# EAGLE board blmc_m8 (EAGLE 4.15)
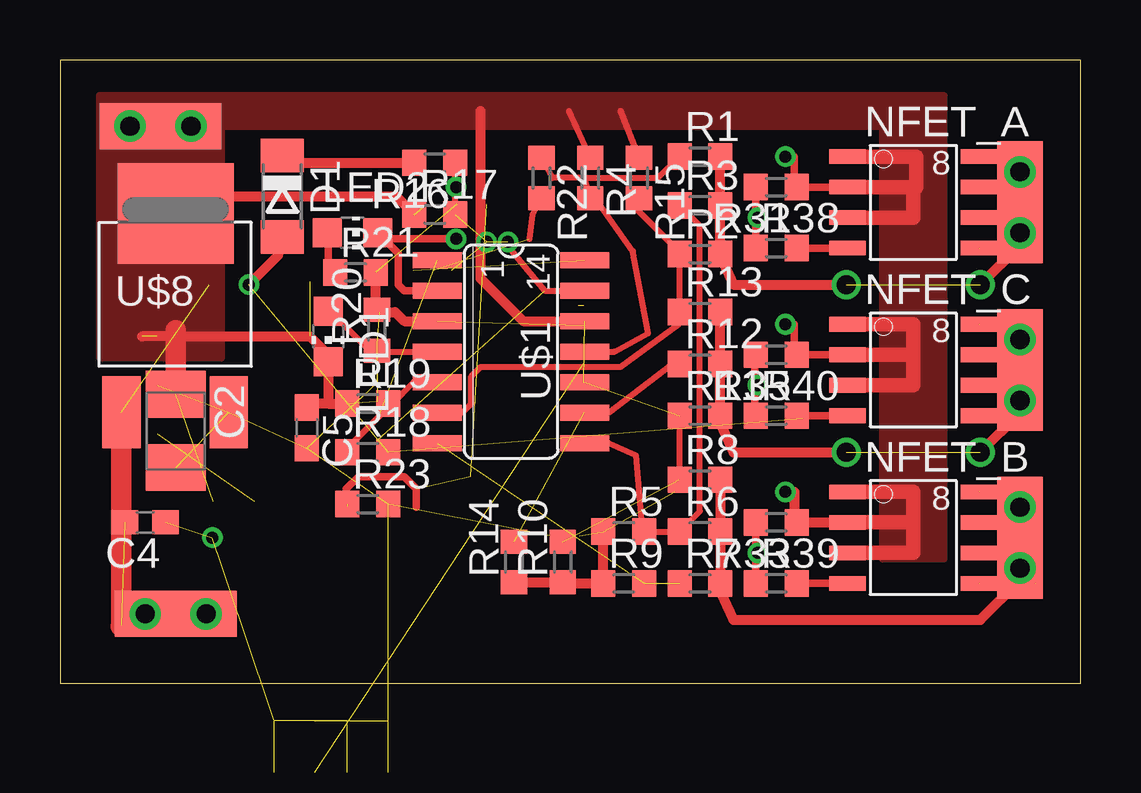
[diagram p0: board, top side]
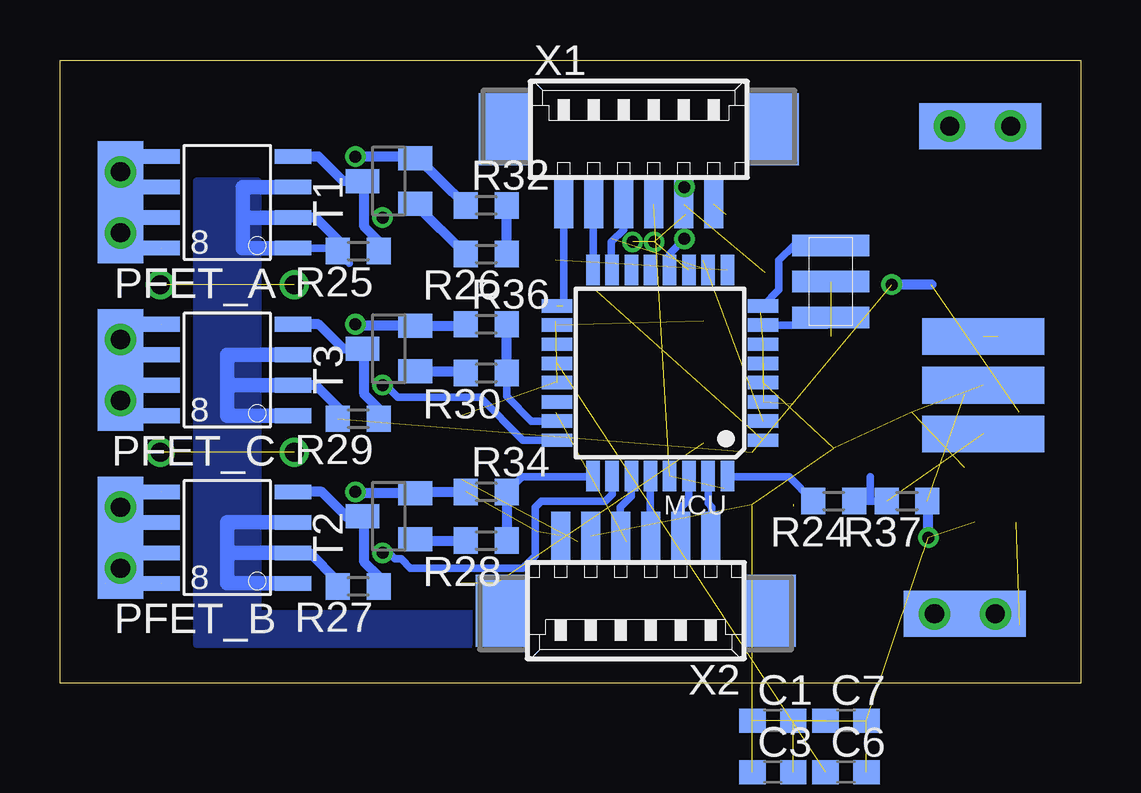
[diagram p1: board, bottom side, seen from below]

Size 42.53 x 25.96 mm. Coordinates in mm from the lower left corner, seen from the top.
Outline: 0,0 42.53,0 42.53,25.96 0,25.96 0,0
Copper layers (1*2+15*16): Top 0.035mm / dielectric 0.2mm / Route2 0.035mm / dielectric 1.5mm / Route15 0.035mm / dielectric 0.2mm / Bottom 0.035mm
Design rules "eurocircuits_verified_4l": minimum track width 0.15mm, minimum drill 0.35mm, track to track 0.15mm, track to pad 0.15mm, pad to pad 0.15mm, via to via 0.15mm, smd to smd 0.15mm, copper to edge 20mil, drill to drill 8mil, minimum pad ring 10mil, minimum via ring 7mil, stop-mask expansion 4mil, vias tented up to drill 0mil, thermal gap 10mil

## Footprints (pad centres in the part's own frame; a part is rotated, then mirrored left to right if it is on the bottom)
C0603 = smd 1.1 x 1: 1 -0.85,0; 2 0.85,0
B/3528-21R = smd 1.95 x 2.5: + 1.525,0; - -1.525,0
SOD80C = smd 1.4 x 1.8: A 1.7,0; C -1.7,0
CHIP-LED0805 = smd 1.2 x 1.2: A 0,-1.05; C 0,1.05
TQFP32-08 = smd 1.27 x 0.559: 1 -4.293,2.8; 2 -4.293,2; 3 -4.293,1.2; 4 -4.293,0.4; 5 -4.293,-0.4; 6 -4.293,-1.2; 7 -4.293,-2; 8 -4.293,-2.8; 17 4.293,-2.8; 18 4.293,-2; 19 4.293,-1.2; 20 4.293,-0.4; 21 4.293,0.4; 22 4.293,1.2; 23 4.293,2; 24 4.293,2.8 | smd 0.559 x 1.27: 9 -2.8,-4.293; 10 -2,-4.293; 11 -1.2,-4.293; 12 -0.4,-4.293; 13 0.4,-4.293; 14 1.2,-4.293; 15 2,-4.293; 16 2.8,-4.293; 25 2.8,4.293; 26 2,4.293; 27 1.2,4.293; 28 0.4,4.293; 29 -0.4,4.293; 30 -1.2,4.293; 31 -2,4.293; 32 -2.8,4.293
SOLD_PAD_1 = smd 1.905 x 5.08: P$1 0,0 | smd 1.905 x 5.08 bottom: P$2 0,0 | drill 0.8 round: P$3 0,1.27; P$4 0,-1.27
SO-8 = smd 1.524 x 0.61: 1 -2.743,1.27; 2 -2.743,0; 3 -2.743,-1.27; 4 -2.743,-2.54; 5 2.743,-2.54; 6 2.743,-1.27; 7 2.743,0; 8 2.743,1.27
R0603 = smd 1 x 1.1: 1 -0.85,0; 2 0.85,0
SOT23 = smd 1 x 1.4: 1 -0.95,-1.1; 2 0.95,-1.1; 3 0,1.1
SO-14 = smd 0.66 x 2.032: 1 -2.54,-3.073; 2 -1.27,-3.073; 3 0,-3.073; 4 1.27,-3.073; 5 2.54,-3.073; 6 3.81,-3.073; 7 5.08,-3.073; 8 5.08,3.073; 9 3.81,3.073; 10 2.54,3.073; 11 1.27,3.073; 12 0,3.073; 13 -1.27,3.073; 14 -2.54,3.073
SOLDER_PAD_200_50 = smd 5.08 x 1.524: P$1 0,0
TO252 = smd 1.6 x 2.997: 1 -2.261,-6.198; 3 2.21,-6.198 | smd 4.826 x 4.191: 4 0,2.083
MICRO_CRYSTAL = smd 0.9 x 3.2: P$1 -1.5,0; P$2 0,0; P$3 1.5,0
53261-06 = smd 0.8 x 2: 1 3.125,-2.5; 2 1.875,-2.5; 3 0.625,-2.5; 4 -0.625,-2.5; 5 -1.875,-2.5; 6 -3.125,-2.5 | smd 2.1 x 3: S1 5.625,0.625; S2 -5.625,0.625

## Placement (x,y rotation side)
C1  100nF  [C0603]  12.82,-1.56 0 bottom
C2  [B/3528-21R]  4.82,10.5 270 top
C3  100nF  [C0603]  12.82,-3.72 0 bottom  (outside the outline)
C4  100nF  [C0603]  3.55,6.69 180 top
C5  100nF  [C0603]  10.28,10.63 270 top
C6  100nF  [C0603]  9.77,-3.72 0 bottom  (outside the outline)
C7  100nF  [C0603]  9.77,-1.56 0 bottom
D1  [SOD80C]  9.27,20.28 270 top
LED1  [CHIP-LED0805]  11.17,14.44 180 top
LED2  [CHIP-LED0805]  12.19,18.76 270 top
MCU  MEGA8-AI  [TQFP32-08]  17.52,12.92 180 bottom
MOT_A  SOLDER_PAD100_75  [SOLD_PAD_1]  40,20.03 0 top
MOT_B  SOLDER_PAD100_75  [SOLD_PAD_1]  40,6.06 0 top
MOT_C  SOLDER_PAD100_75  [SOLD_PAD_1]  40,13.04 0 top
NFET_A  SI4420N  [SO-8]  35.56,20.66 0 top
NFET_B  SI4420N  [SO-8]  35.56,6.69 0 top
NFET_C  SI4420N  [SO-8]  35.56,13.68 0 top
PFET_A  SI4425P  [SO-8]  35.56,19.39 180 bottom
PFET_B  SI4425P  [SO-8]  35.56,5.42 180 bottom
PFET_C  SI4425P  [SO-8]  35.56,12.41 180 bottom
R1  10k  [R0603]  26.67,21.93 0 top
R2  20k  [R0603]  26.67,17.87 0 top
R3  20k  [R0603]  26.67,19.9 0 top
R4  2k2  [R0603]  22.09,21.04 270 top
R5  2k2  [R0603]  23.49,6.31 0 top
R6  20k  [R0603]  26.67,6.31 0 top
R7  10k  [R0603]  26.67,4.15 0 top
R8  20k  [R0603]  26.67,8.47 0 top
R9  2k2  [R0603]  23.49,4.15 0 top
R10  2k2  [R0603]  20.95,5.04 90 top
R11  20k  [R0603]  26.67,11.14 0 top
R12  10k  [R0603]  26.67,13.3 0 top
R13  20k  [R0603]  26.67,15.46 0 top
R14  2k2  [R0603]  18.92,5.04 90 top
R15  2k2  [R0603]  24.13,21.04 270 top
R16  20k  [R0603]  15.62,21.68 180 top
R17  2k2  [R0603]  15.62,19.52 0 top
R18  20k  [R0603]  12.82,9.61 0 top
R19  10k  [R0603]  12.82,11.65 0 top
R20  2k2  [R0603]  13.2,14.69 90 top
R21  2k2  [R0603]  12.31,17.11 0 top
R22  10k  [R0603]  20.06,21.04 270 top
R23  10k  [R0603]  12.82,7.46 0 top
R24  10k  [R0603]  10.28,7.58 180 bottom
R25  680R  [R0603]  30.09,18 180 bottom
R26  10k  [R0603]  24.76,17.87 180 bottom
R27  680R  [R0603]  30.09,4.03 180 bottom
R28  10k  [R0603]  24.76,5.93 180 bottom
R29  680R  [R0603]  30.09,11.01 180 bottom
R30  10k  [R0603]  24.76,12.92 180 bottom
R31  47k  [R0603]  29.84,20.66 180 top
R32  47k  [R0603]  24.76,19.9 0 bottom
R33  47k  [R0603]  29.84,6.69 180 top
R34  47k  [R0603]  24.76,7.96 0 bottom
R35  47k  [R0603]  29.84,13.68 180 top
R36  47k  [R0603]  24.76,14.95 0 bottom
R37  47k  [R0603]  7.23,7.58 180 bottom
R38  100R  [R0603]  29.84,18.12 0 top
R39  100R  [R0603]  29.84,4.15 0 top
R40  100R  [R0603]  29.84,11.14 0 top
T1  BC847  [SOT23]  28.82,20.92 90 bottom
T2  BC847  [SOT23]  28.82,6.95 90 bottom
T3  BC847  [SOT23]  28.82,13.93 90 bottom
U$1  LM339SO  [SO-14]  18.79,15.08 270 top
U$2  SOLDER_PAD200_50  [SOLDER_PAD_200_50]  4.06,14.44 0 bottom
U$3  SOLDER_PAD200_50  [SOLDER_PAD_200_50]  4.06,12.41 0 bottom
U$4  SOLDER_PAD200_50  [SOLDER_PAD_200_50]  4.06,10.38 0 bottom
U$8  L4941SMD  [TO252]  4.82,17.49 0 top
U$9  MICRO_RESO  [MICRO_CRYSTAL]  10.41,16.73 270 bottom
X1  [53261-06]  18.41,22.44 0 bottom
X2  [53261-06]  18.54,3.65 180 bottom
X4  SOLDER_PAD100_75  [SOLD_PAD_1]  4.82,2.88 90 top
X5  SOLDER_PAD100_75  [SOLD_PAD_1]  4.19,23.2 90 top

## Library data of the parts
C1-C7 R1-R40 = rcl
D1 = diode
LED1 LED2 = led
MCU = atmel
MOT_A MOT_B MOT_C U$2-U$4 U$9 X4 X5 = paparazzi
NFET_A NFET_B NFET_C PFET_A PFET_B PFET_C U$1 U$8 = bko
T1-T3 = transistor-npn
X1 X2 = con-molex

## Nets
1_PFET_A: MCU.14
1_PFET_B: MCU.13
+5V: C1.1 C2.+ C3.1 C5.2 C7.1 MCU.4 MCU.6 MCU.18 R20.2 R21.2 R23.2 U$1.3 U$3.P$1 U$8.3 X1.2 X2.2
+UB: C4.2 D1.A PFET_A.1 PFET_B.1 PFET_C.1 R18.2 R25.2 R27.2 R29.2 U$8.1 X4.P$1
AIN0: MCU.10 R22.2
AIN1: MCU.11 R16.1 R17.2
COMP_A: MCU.1 U$1.13
COMP_B: MCU.2 U$1.1
COMP_C: MCU.9 U$1.14
GND: C1.2 C2.- C3.2 C4.1 C5.1 C6.2 C7.2 LED1.C MCU.3 MCU.5 MCU.21 NFET_A.1 NFET_B.1 NFET_C.1 R4.1 R5.1 R9.1 R10.1 R14.1 R15.1 R17.1 R19.1 R31.1 R32.1 R33.1 R34.1 R35.1 R36.1 R37.1 T1.2 T2.2 T3.2 U$1.12 U$2.P$1 U$8.4 U$9.P$2 X1.1 X2.1 X5.P$1
INT0: MCU.32 R24.2
LED/AQ: LED2.C MCU.12 U$1.2
MISO: MCU.16 X1.5
MOSI: MCU.15 X1.4
MOT_A: MOT_A.P$1 NFET_A.5 NFET_A.6 NFET_A.7 NFET_A.8 PFET_A.5 PFET_A.6 PFET_A.7 PFET_A.8 R1.2 R2.2 R3.2
MOT_B: MOT_B.P$1 NFET_B.5 NFET_B.6 NFET_B.7 NFET_B.8 PFET_B.5 PFET_B.6 PFET_B.7 PFET_B.8 R6.2 R7.2 R8.2
MOT_C: MOT_C.P$1 NFET_C.5 NFET_C.6 NFET_C.7 NFET_C.8 PFET_C.5 PFET_C.6 PFET_C.7 PFET_C.8 R11.2 R12.2 R13.2
N$2: R2.1 R13.1 R15.2 U$1.6
N$3: R1.1 R4.2 R22.1 U$1.11
N$5: NFET_A.4 R38.2
N$6: C6.1 MCU.20
N$8: NFET_B.4 R39.2
N$9: NFET_C.4 R40.2
N$10: R3.1 R5.2 R6.1 U$1.8
N$12: R7.1 R9.2 U$1.7
N$13: R8.1 R10.2 R11.1 U$1.10
N$15: R12.1 R14.2 U$1.9
N$21: LED2.A R21.1
N$22: R24.1 R37.2 U$4.P$1
N$23: R18.1 R19.2 U$1.5
N$24: PFET_B.4 R27.1 T2.3
N$25: LED1.A R20.1 U$1.4
N$29: D1.C R16.2
N$34: PFET_A.4 R25.1 T1.3
N$35: MCU.8 U$9.P$1
N$37: MCU.7 U$9.P$3
N$39: PFET_C.4 R29.1 T3.3
N$46: R30.2 T3.1
N$47: R28.2 T2.1
N$48: R26.2 T1.1
NFET_A: R31.2 R38.1
NFET_B: MCU.26 R33.2 R39.1
NFET_C: MCU.24 R35.2 R40.1
PFET_A: R26.1 R32.2
PFET_B: MCU.25 R28.1 R34.2
PFET_C: MCU.23 R30.1 R36.2
RESET: MCU.29 R23.1 X1.3
RXD: MCU.30 X2.5
SCK: MCU.17 X1.6
SCL: MCU.28 X2.4
SDA: MCU.27 X2.3
TXD: MCU.31 X2.6

## Tracks (layer width: path | path; a pad name or v marks a point on that pad's centre or on a via)
+5V  (13 unrouted)
  Top 0.406: R21.2 13.16,15.5 13.2,15.46 R20.2 13.24,15.54 13.33,15.46 13.96,15.46 14.35,15.08 U$1.3
+UB  (via drill 0.5)  (4 unrouted)
  Top 0.406: D1.A 9.09,17.82 v7.87,16.6
  Top 0.864: U$8.1 2.56,2.4 2.54,2.38 4.31,2.38 X4.P$1
  Bottom 0.305: PFET_A.1 31.11,18.12 30.48,17.49
  Bottom 0.406: 32.38,5.42 32.13,5.42 30.94,4.24 R27.2 | 32.38,12.41 31.87,12.41 30.94,11.48 R29.2 | R25.2 30.82,18.34 31.87,19.39 33.02,19.39 | 6.22,16.6 v7.87,16.6
  Bottom 0.61: PFET_A.1 34.92,18.12 34.92,19.39 | 33.02,19.39 34.92,19.39 | 34.92,19.39 34.92,20.66 33.02,20.66 | PFET_C.1 35.56,11.14 35.56,12.41 | 32.38,12.41 35.56,12.41 | 35.56,12.41 35.56,13.68 32.38,13.68 | PFET_B.1 35.56,4.15 35.56,5.42 | 32.38,5.42 35.56,5.42 | 35.56,5.42 35.56,6.69 32.38,6.69
  pour Bottom (no thermals): 34.28,20.92 36.83,20.92 36.83,1.61 2.28,1.61 2.28,4.15 6.73,4.15 6.73,2.88 34.28,2.88
AIN0  (1 unrouted)
  Top 0.254: R22.2 19.68,19.52 19.55,18.5
AIN1  (via drill 0.5)  (3 unrouted)
  Top 0.254: R16.1 16.47,20.7 v16.5,20.66 16.47,20.62 R17.2
  other vias: 18.66,18.38 17.78,18.38
COMP_A  (1 unrouted)
  Top 0.254: U$1.13 20.19,16.34 18.41,18.5
COMP_B  (1 unrouted)
COMP_C  (1 unrouted)
GND  (via drill 0.5)  (14 unrouted)
  Top 0.254: R4.1 21.2,23.84 | R15.1 23.36,23.84
  Top 0.305: 32.38,13.68 R35.1 30.6,13.68 30.6,14.95 v30.22,14.95 | 30.6,6.69 R33.1 | 32.38,20.66 R31.1 30.6,20.66 30.6,21.93 v30.22,21.93
  Top 0.406: R33.1 32.38,6.69 | 30.6,6.69 30.6,7.96 v30.22,7.96 | R5.1 22.64,4.19 22.6,4.15 R9.1 20.95,4.15 R10.1 18.83,4.19 18.79,4.15 R14.1 | C5.1 10.45,11.65 11.17,11.65 | 11.17,11.65 R19.1 | 11.17,11.65 LED1.C 11.17,13.68 10.41,14.44 4.82,14.44 3.42,14.44 | 17.52,23.84 17.52,16.85 19.3,15.08 U$1.12 | R17.1 14,20.28 4.82,20.28 U$8.4 4.82,19.52
  Top 0.61: NFET_A.1 35.68,21.93 35.68,20.66 35.56,20.66 | 32.38,20.66 35.56,20.66 | 35.56,20.66 35.56,19.39 32.38,19.39 | NFET_C.1 35.56,14.95 35.56,13.68 | 32.38,13.68 35.56,13.68 | 35.56,13.68 35.56,12.41 32.38,12.41 | NFET_B.1 35.56,7.96 35.56,6.69 | 32.38,6.69 35.56,6.69 | 35.56,6.69 35.56,5.42 32.38,5.42
  Top 0.864: 4.82,14.69 4.82,14.44 C2.-
  Bottom 0.406: v30.22,7.96 29.9,7.9 T2.2 27.72,7.92 27.68,7.96 R34.1 | R36.1 25.65,14.95 25.71,14.88 T3.2 30.16,14.88 v30.22,14.95 | R32.1 27.68,21.93 | T1.2 27.72,21.89 27.68,21.93 | 27.68,21.93 v30.22,21.93 | R37.1 v6.35,6.06
  pour Top (no thermals): 34.28,5.17 34.28,23.2 6.73,23.2 6.73,13.55 1.65,13.55 1.65,24.47 36.83,24.47 36.83,5.17
INT0
  Bottom 0.305: MCU.32 14.73,8.6 12.15,8.6 R24.2
LED/AQ  (via drill 0.5)
  Top 0.305: 15.74,16.34 U$1.2 14.35,16.34 14.09,16.6 14.09,17.9 LED2.C 13.2,18.76 13.46,18.5 v16.5,18.5
  Bottom 0.305: MCU.12 17.12,17.89 v16.5,18.5
MISO
  Bottom 0.305: 20.29,17.26 20.32,17.23 MCU.16 | MCU.16 20.32,17.11 | X1.5 20.32,19.91 MCU.16
MOSI
  Bottom 0.305: X1.4 19.04,18.9 19.55,18.38 19.55,17.36 19.52,17.33 MCU.15
MOT_A  (via drill 0.8)  (2 unrouted)
  Top 0.406: v32.76,16.6 28.06,16.6 27.52,17.78 R2.2 27.55,17.87 27.52,17.91 R3.2 27.55,19.9 27.52,19.94 R1.2 | v38.35,16.6 40,18.25 MOT_A.P$1
  Top 0.61: PFET_A.5 40,21.93 MOT_A.P$1 | PFET_A.6 40,20.66 MOT_A.P$1 | 40,19.39 NFET_A.6 | MOT_A.P$1 40,19.39 | NFET_A.5 40,18.12 40,19.39
  Bottom 0.61: PFET_A.5 40.64,21.93 40.64,20.66 | 40.64,20.66 PFET_A.6 | NFET_A.6 40.64,19.39 | 40.64,19.39 40.64,20.66 | NFET_A.5 40.64,18.12 40.64,19.39
MOT_B  (3 unrouted)
  Top 0.406: 40,4.15 40,4.28 38.35,2.63 28.06,2.63 27.52,3.81 R7.2 27.55,4.15 R6.2 27.55,6.31 R8.2
  Top 0.61: 40,4.15 40.64,4.15 | PFET_B.5 40.64,7.96 MOT_B.P$1 | PFET_B.6 40.64,6.69 MOT_B.P$1 | NFET_B.6 40.64,5.42 MOT_B.P$1
  Bottom 0.61: PFET_B.5 40.64,7.96 40.64,6.06 | PFET_B.6 40.64,6.69 40.64,6.06 | NFET_B.6 40.64,5.42 40.64,6.06 | NFET_B.5 40.64,4.15 40.64,6.06
MOT_C  (via drill 0.8)  (2 unrouted)
  Top 0.305: R12.2 27.43,13.3
  Top 0.406: v32.76,9.61 28.06,9.61 27.52,10.8 R11.2 27.55,11.14 27.52,11.18 R12.2 27.55,13.3 27.52,13.34 R13.2 | v38.35,9.61 40,11.27
  Top 0.61: PFET_C.5 40,14.95 MOT_C.P$1 | PFET_C.6 40,13.68 MOT_C.P$1 | NFET_C.6 40,12.41 MOT_C.P$1 | NFET_C.5 40,11.14 40,11.27 MOT_C.P$1
  Bottom 0.61: PFET_C.5 40.64,14.95 40.64,13.04 | PFET_C.6 40.64,13.68 40.64,13.04 | NFET_C.6 40.64,12.41 40.64,13.04 | NFET_C.5 40.64,11.14 40.64,13.04
N$2
  Top 0.254: R15.2 24,19.77 25.82,17.96 R2.1 25.82,15.5 25.78,15.46 | 25.78,15.46 R13.1 | 25.78,15.46 25.78,14.95 23.36,13.17 17.52,13.17 17.14,12.79 17.14,11.65 16.76,11.27 U$1.6
N$3
  Top 0.254: R22.1 20.53,21.04 21.84,21.04 | 21.84,21.04 23.11,21.04 | 23.11,21.04 23.24,21.04 | R1.1 24.93,21.04 23.11,21.04 | 21.84,21.04 R4.2 22.31,20.19 23.87,18 24.51,14.57 23.11,13.8 U$1.11
N$5
  Top 0.305: 30.48,18.12 R38.2 NFET_A.4
N$6  (1 unrouted)
N$8
  Top 0.305: 30.6,4.15 R39.2 NFET_B.4
N$9
  Top 0.305: 30.48,11.14 R40.2 NFET_C.4
N$10
  Top 0.254: R3.1 26.67,19.05 26.67,7.16 R6.1 R5.2 24.25,6.31 24,9.49 22.86,10 U$1.8
N$12  (2 unrouted)
N$13  (2 unrouted)
  Top 0.254: R8.1 25.78,8.47 25.82,8.51 R11.1
N$15  (1 unrouted)
  Top 0.254: R12.1 25.52,13.3 22.86,11.27 U$1.9 21.84,11.27
N$21
  Top 0.305: LED2.A 11.17,18.76 11.17,17.4 R21.1
N$22  (1 unrouted)
  Bottom 0.305: 9.52,7.58 R24.1 8.76,7.58 | R37.2 8.76,7.58 | 8.76,7.58 8.76,8.6
N$23
  Top 0.254: R18.1 11.97,9.78 13.67,11.48 R19.2 13.84,11.65 14.73,12.54 U$1.5
N$24
  Bottom 0.406: PFET_B.4 31.62,7.96 30.6,6.95 T2.3 29.92,6.9 29.84,6.82 29.84,5.04 29.24,4.45 R27.1
N$25
  Top 0.254: LED1.A 11.26,15.49 12.91,13.84 R20.1 13.2,13.8 U$1.4
N$29
  Top 0.406: D1.C 9.73,21.68 R16.2
N$34
  Bottom 0.406: R25.1 29.24,18.42 29.84,19.01 29.84,20.92 T1.3 30.73,20.92 31.75,21.93 PFET_A.4
N$35
  Bottom 0.305: MCU.8 12.57,16.38 12.57,17.62 11.93,18.25 10.39,18.25 | 10.39,18.25 10.28,18.25 | 10.39,18.25 U$9.P$1
N$37
  Bottom 0.305: U$9.P$3 10.31,15.23 10.28,15.2 10.57,14.92 MCU.7
N$39
  Bottom 0.406: PFET_C.4 31.75,14.95 30.73,13.93 T3.3 29.84,13.93 29.84,12.03 29.24,11.43 R29.1
N$46
  Bottom 0.406: R30.2 25.65,12.92 25.71,12.98 T3.1
N$47
  Bottom 0.406: T2.1 27.72,5.97 27.68,5.93 R28.2
N$48
  Bottom 0.406: T1.1 27.72,19.94 27.68,19.9 R26.2
NFET_A  (via drill 0.5)
  Top 0.305: 28.95,18.12 R38.1 28.99,19.3 v29.08,19.39 28.99,19.39 R31.2
NFET_B  (via drill 0.5)
  Top 0.305: 28.95,4.15 R39.1 28.99,5.42 | 28.99,5.42 R33.2 | v29.08,5.42 28.99,5.42
  Bottom 0.305: v29.08,5.42 28.82,5.42 28.57,5.17 28.32,5.17 27.93,4.79 23.24,4.79 22.73,5.3 22.73,7.33 22.47,7.58 19.81,7.58 19.52,7.87 MCU.26
NFET_C  (via drill 0.5)
  Top 0.305: R40.1 28.95,11.14 28.95,12.41 | 28.99,12.41 v29.08,12.41 28.95,12.41 | R35.2 28.95,13.68 28.95,12.41
  Bottom 0.305: v29.08,12.41 28.95,12.41 28.44,11.9 25.01,11.9 23.24,10.12 21.84,10.12 21.83,10.12 MCU.24
PFET_A
  Bottom 0.406: R26.1 23.87,17.87 23.91,17.91 R32.2
PFET_B
  Bottom 0.305: MCU.25 20.32,8.6 23.28,8.6 R34.2
  Bottom 0.406: R28.1 23.87,5.93 23.91,5.97 R34.2
PFET_C
  Bottom 0.305: R30.1 23.91,11.94 22.89,10.92 MCU.23
  Bottom 0.406: R30.1 23.91,13 23.87,13.04 23.91,13.08 R36.2
RESET  (3 unrouted)
  Top 0.305: 14.85,7.33 14.85,8.09 14.35,8.6 12.44,8.6 11.93,8.09 11.93,7.33 11.97,7.37
RXD
  Bottom 0.305: MCU.30 16.32,7.64 16.63,7.33 16.63,6.06 16.66,6.09 X2.5
SCK  (2 unrouted)
  Bottom 0.305: 21.59,15.72 21.59,15.71 21.54,15.76 X1.6 | 21.83,15.72 21.84,15.71
SCL
  Bottom 0.305: X2.4 17.91,6.18 17.9,6.19 17.92,6.2 MCU.28
SDA
  Bottom 0.305: MCU.27 18.72,7.78 19.17,7.33 19.17,6.19 19.16,6.18 X2.3
TXD
  Bottom 0.305: MCU.31 15.52,7.49 15.36,7.33 15.36,6.19 15.4,6.15 X2.6